# Altium PCB Copy of GSH_Bed_V1.0.PcbDoc
Units mm, origin at the board's own origin, x right, y up, seen from the top; angles counter-clockwise.
Board outline 90 x 57 mm, 2 copper layers (Top Layer, Bottom Layer); 62 components, 55 nets, 266 pads, 410 vias.
Unrouted connection lines stored in the file: 43.
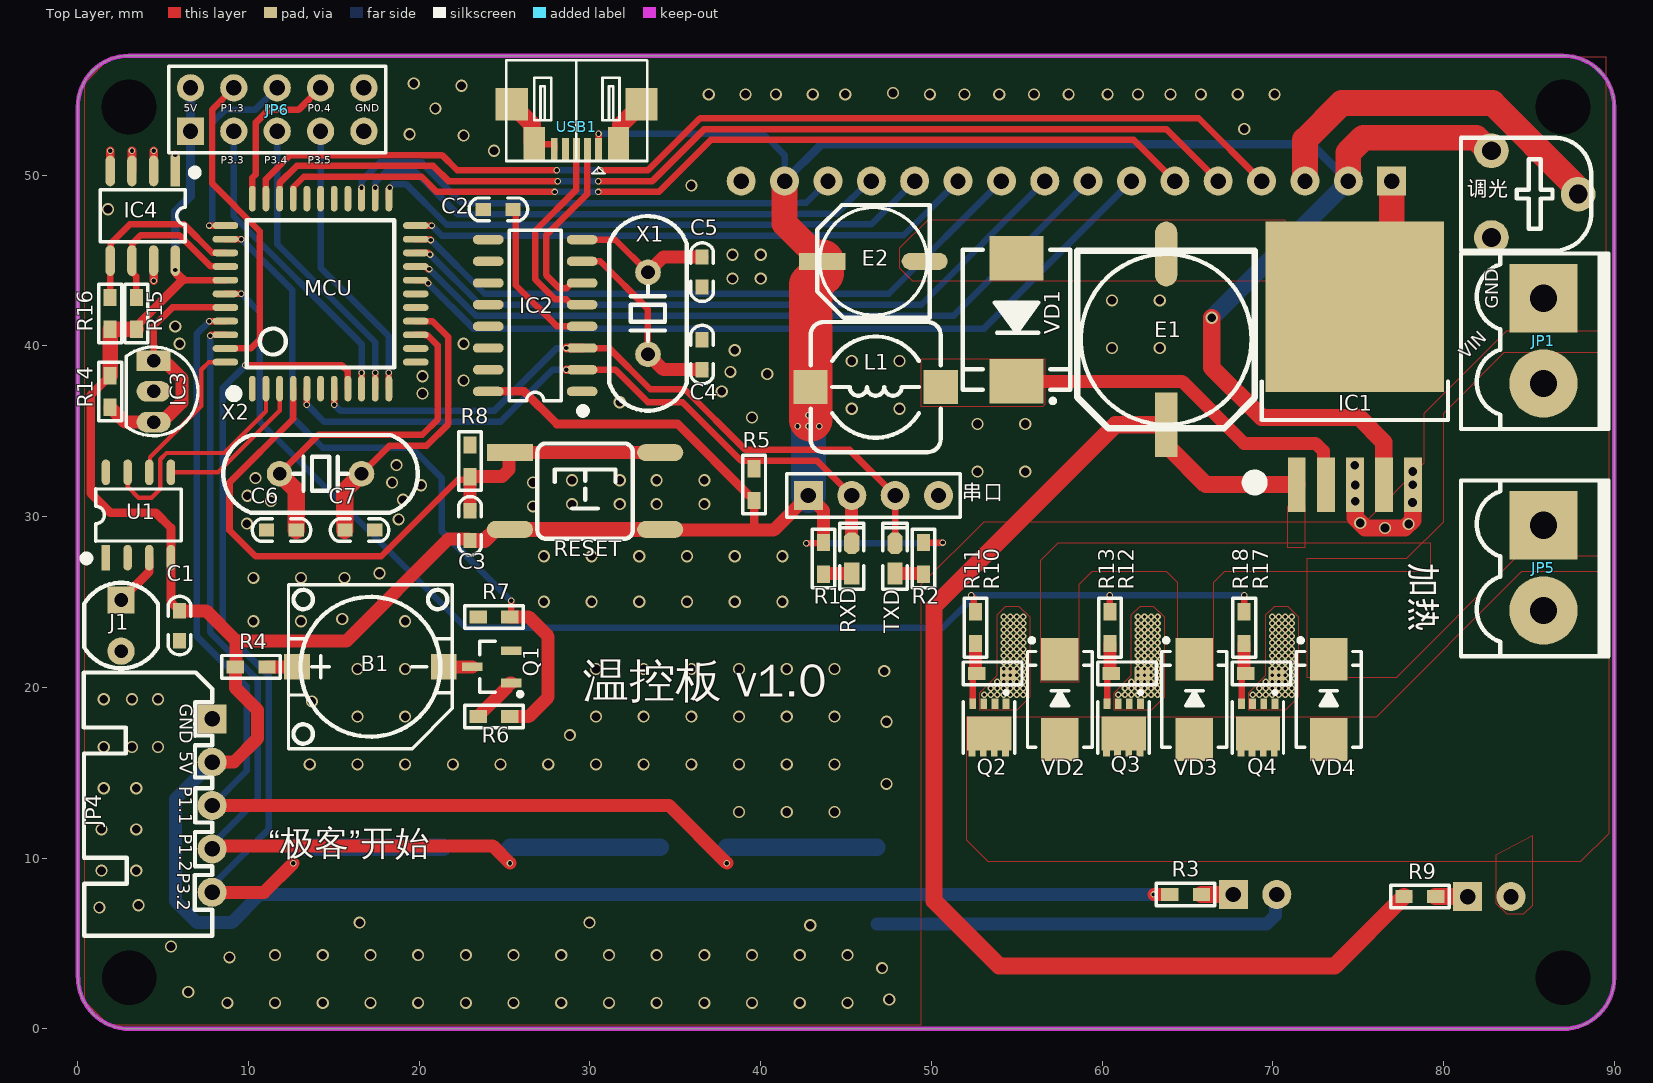
[diagram p0: Top Layer view]
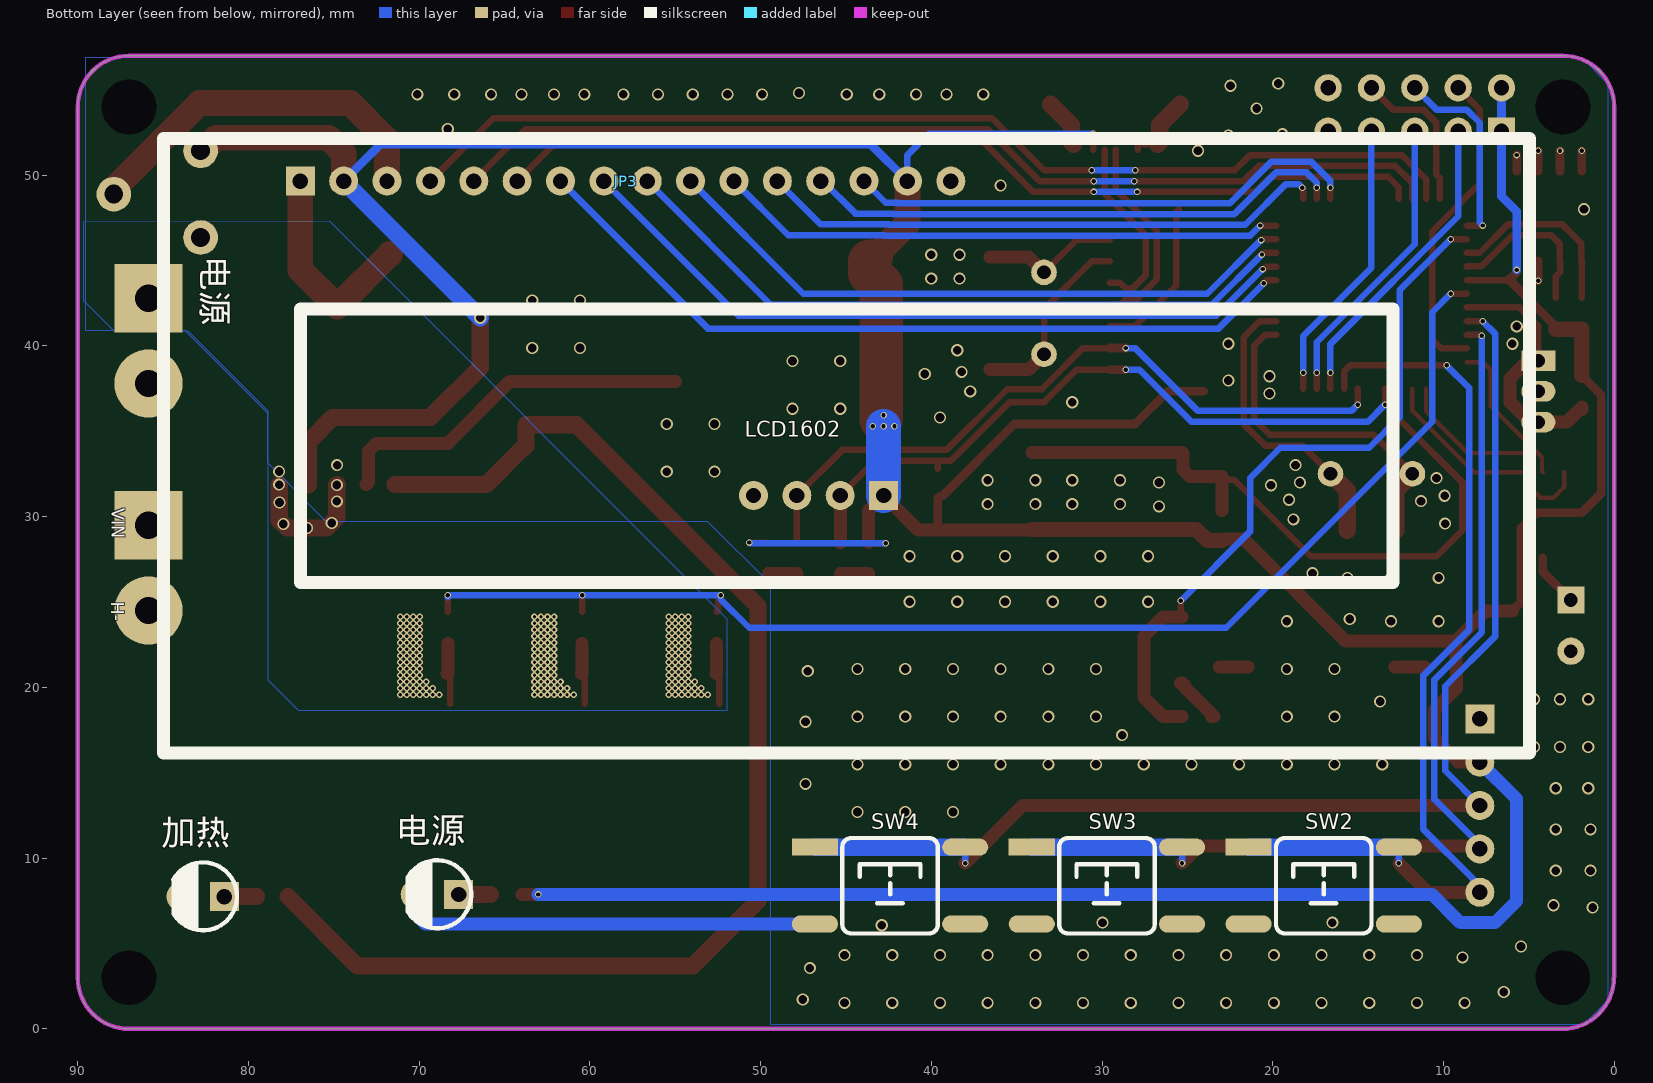
[diagram p1: Bottom Layer view, seen from below]

## Layer stack, top to bottom
Top Solder: solder mask 0.0102, Solder Resist, Dk 3.5
Top Layer: signal copper 0.0356
Dielectric 1: dielectric 0.32, FR-4, Dk 4.8
Bottom Layer: signal copper 0.0356
Bottom Solder: solder mask 0.0102, Solder Resist, Dk 3.5

## Board outline
0,3.023 0,54 cw(c3,54) 3,57 87,57 cw(c87,54) 90,54 90,3 cw(c87,3) 87,0 3.023,0 cw(c3.023,3)

## Design rules (kind name [scope] priority, off if disabled: settings)
AssemblyTestPointUsage [All] p0: scope1count=1 scope1_0_kind=Board scope1_0_value=Board scope2count=1 scope2_0_kind=Board scope2_0_value=Board commentlength=0
AssemblyTestpoint [All] p0: scope1count=1 scope1_0_kind=Board scope1_0_value=Board scope2count=1 scope2_0_kind=Board scope2_0_value=Board commentlength=0
Clearance [All] p0: scope1count=1 scope1_0_kind=Board scope1_0_value=Board scope2count=1 scope2_0_kind=Board scope2_0_value=Board commentlength=0 gap=0.254
Clearance [All] p1: gap=0.254 ignorepadtopadclearanceinfootprint=TRUE except(0: Arc-Hole Track-Hole SMDPad-Via SMDPad-Hole THPad-Via THPad-Hole Via-Via Via-Hole Fill-Hole Poly-Hole Region-Hole Text-Hole)
ComponentClearance [All] p0: scope1count=1 scope1_0_kind=Board scope1_0_value=Board scope2count=1 scope2_0_kind=Board scope2_0_value=Board commentlength=0 gap=0 collisioncheckmode=3
ComponentClearance [All] p1: gap=0 collisioncheckmode=3 verticalgap=0 showdistances=FALSE donotcheckwithout3dbody=TRUE
DiffPairsRouting [All] p0: scope1count=1 scope1_0_kind=Board scope1_0_value=Board scope2count=1 scope2_0_kind=Board scope2_0_value=Board commentlength=0
FabricationTestPointUsage [All] p0: scope1count=1 scope1_0_kind=Board scope1_0_value=Board scope2count=1 scope2_0_kind=Board scope2_0_value=Board commentlength=0 valid=0 allowmultiple=FALSE
FabricationTestpoint [All] p0: scope1count=1 scope1_0_kind=Board scope1_0_value=Board scope2count=1 scope2_0_kind=Board scope2_0_value=Board commentlength=0 side=3 testpointundercomponent=TRUE minsize=1.016 maxsize=2.54 preferedsize=1.524 minholesize=0 maxholesize=1.016 preferedholesize=0.813 testpointgrid=0.025
FanoutControl Fanout_BGA [All] p0 off: scope1count=1 scope1_0_kind=Board scope1_0_value=Board scope2count=1 scope2_0_kind=Board scope2_0_value=Board commentlength=69 // Protel DXP Scope 1 Expression Was: IsBGA   Fanout_BGA (Default Rule)
FanoutControl Fanout_LCC [All] p0 off: scope1count=1 scope1_0_kind=Board scope1_0_value=Board scope2count=1 scope2_0_kind=Board scope2_0_value=Board commentlength=69 // Protel DXP Scope 1 Expression Was: IsLCC   Fanout_LCC (Default Rule)
FanoutControl Fanout_SOIC [All] p0 off: scope1count=1 scope1_0_kind=Board scope1_0_value=Board scope2count=1 scope2_0_kind=Board scope2_0_value=Board commentlength=71 // Protel DXP Scope 1 Expression Was: IsSOIC   Fanout_SOIC (Default Rule)
FanoutControl Fanout_Small [All] p0 off: scope1count=1 scope1_0_kind=Board scope1_0_value=Board scope2count=1 scope2_0_kind=Board scope2_0_value=Board commentlength=84 // Protel DXP Scope 1 Expression Was: (CompPinCount < 5)   Fanout_Small (Default Rule)
FanoutControl Fanout_Default [All] p0: scope1count=1 scope1_0_kind=Board scope1_0_value=Board scope2count=1 scope2_0_kind=Board scope2_0_value=Board commentlength=30 // Fanout_Default (Default Rule)
Height [All] p0: scope1count=1 scope1_0_kind=Board scope1_0_value=Board scope2count=1 scope2_0_kind=Board scope2_0_value=Board commentlength=0
HoleSize [All] p0: scope1count=1 scope1_0_kind=Board scope1_0_value=Board scope2count=1 scope2_0_kind=Board scope2_0_value=Board commentlength=0 absolutevalues=TRUE maxlimit=2.54 minlimit=0.025 maxpercent=80.000 minpercent=20.000
HoleToHoleClearance [All] p0: scope1count=1 scope1_0_kind=Board scope1_0_value=Board scope2count=1 scope2_0_kind=Board scope2_0_value=Board commentlength=0
LayerPairs [All] p0: scope1count=1 scope1_0_kind=Board scope1_0_value=Board scope2count=1 scope2_0_kind=Board scope2_0_value=Board commentlength=0 enforce=TRUE
MinimumSolderMaskSliver [All] p0: scope1count=1 scope1_0_kind=Board scope1_0_value=Board scope2count=1 scope2_0_kind=Board scope2_0_value=Board commentlength=0
NetAntennae [All] p0: scope1count=1 scope1_0_kind=Board scope1_0_value=Board scope2count=1 scope2_0_kind=Board scope2_0_value=Board commentlength=0
PasteMaskExpansion [All] p0: scope1count=1 scope1_0_kind=Board scope1_0_value=Board scope2count=1 scope2_0_kind=Board scope2_0_value=Board commentlength=0 expansion=0
PlaneClearance [All] p0: scope1count=1 scope1_0_kind=Board scope1_0_value=Board scope2count=1 scope2_0_kind=Board scope2_0_value=Board commentlength=0 clearance=0.508
PlaneConnect [All] p0: scope1count=1 scope1_0_kind=Board scope1_0_value=Board scope2count=1 scope2_0_kind=Board scope2_0_value=Board commentlength=0 planeconnectstyle=Relief reliefexpansion=0.508 reliefentries=4 reliefconductorwidth=0.762 reliefairgap=0.762
PlaneConnect [All] p1: planeconnectstyle=Relief reliefexpansion=0.508 reliefentries=4 reliefconductorwidth=0.762 reliefairgap=0.762
PolygonConnect 5V [All] p0: scope1count=1 scope1_0_kind=Net scope1_0_value=5V scope2count=1 scope2_0_kind=Net scope2_0_value=5V commentlength=0 connectstyle=Direct reliefconductorwidth=0.254 reliefentries=4 polygonreliefangle="90 Angle"
PolygonConnect 1 [All] p0: scope1count=1 scope1_0_kind=Net scope1_0_value=NetIC1_2 scope2count=1 scope2_0_kind=Net scope2_0_value=NetIC1_2 commentlength=0 connectstyle=Direct reliefconductorwidth=0.254 reliefentries=4 polygonreliefangle="90 Angle"
PolygonConnect H- [All] p0: scope1count=1 scope1_0_kind=Net scope1_0_value=H- scope2count=1 scope2_0_kind=Net scope2_0_value=H- commentlength=0 connectstyle=Direct reliefconductorwidth=0.254 reliefentries=4 polygonreliefangle="90 Angle"
PolygonConnect VIN [All] p0: scope1count=1 scope1_0_kind=Net scope1_0_value=VIN scope2count=1 scope2_0_kind=Net scope2_0_value=VIN commentlength=0 connectstyle=Direct reliefconductorwidth=0.254 reliefentries=4 polygonreliefangle="90 Angle"
PolygonConnect GND [All] p0: scope1count=1 scope1_0_kind=Net scope1_0_value=GND scope2count=1 scope2_0_kind=Net scope2_0_value=GND commentlength=0 connectstyle=Direct reliefconductorwidth=0.254 reliefentries=4 polygonreliefangle="90 Angle"
PolygonConnect [All] p0: scope1count=1 scope1_0_kind=Board scope1_0_value=Board scope2count=1 scope2_0_kind=Board scope2_0_value=Board commentlength=0 connectstyle=Relief reliefconductorwidth=0.762 reliefentries=4 polygonreliefangle="45 Angle"
PolygonConnect 5V [InNet('5V') vs InNet('5V')] p1: connectstyle=Direct reliefconductorwidth=0.254 reliefentries=4 polygonreliefangle="90 Angle" airgapwidth=0.254
PolygonConnect H- [InNet('H-') vs InNet('H-')] p2: thpad.connectstyle=Direct thpad.reliefconductorwidth=0.254 thpad.reliefentries=4 thpad.polygonreliefangle="90 Angle" thpad.airgapwidth=0.254 smdpad.connectstyle=Direct smdpad.reliefconductorwidth=0.254 smdpad.reliefentries=4 smdpad.polygonreliefangle="90 Angle" smdpad.airgapwidth=0.254 via.connectstyle=Relief via.reliefconductorwidth=0.254 via.reliefentries=4 via.polygonreliefangle="90 Angle" via.airgapwidth=0.254
PolygonConnect VIN [InNet('VIN') vs InNet('VIN')] p3: thpad.connectstyle=Direct thpad.reliefconductorwidth=0.254 thpad.reliefentries=4 thpad.polygonreliefangle="90 Angle" thpad.airgapwidth=0.254 smdpad.connectstyle=Direct smdpad.reliefconductorwidth=0.254 smdpad.reliefentries=4 smdpad.polygonreliefangle="90 Angle" smdpad.airgapwidth=0.254 via.connectstyle=Relief via.reliefconductorwidth=0.254 via.reliefentries=4 via.polygonreliefangle="90 Angle" via.airgapwidth=0.254
PolygonConnect GND [InNet('GND') vs InNet('GND')] p4: connectstyle=Direct reliefconductorwidth=0.254 reliefentries=4 polygonreliefangle="90 Angle" airgapwidth=0.254
PolygonConnect 1 [InNet('NetIC1_2') vs InNet('NetIC1_2')] p5: connectstyle=Direct reliefconductorwidth=0.254 reliefentries=4 polygonreliefangle="90 Angle" airgapwidth=0.254
PolygonConnect [All] p6: connectstyle=Relief reliefconductorwidth=0.762 reliefentries=4 polygonreliefangle="45 Angle" airgapwidth=1.27
RoutingCorners [All] p0: scope1count=1 scope1_0_kind=Board scope1_0_value=Board scope2count=1 scope2_0_kind=Board scope2_0_value=Board commentlength=0 cornerstyle=45-Degree minsetback=2.54 maxsetback=2.54
RoutingLayers [All] p0: scope1count=1 scope1_0_kind=Board scope1_0_value=Board scope2count=1 scope2_0_kind=Board scope2_0_value=Board commentlength=0 top layer=Automatic bottom layer=Automatic
RoutingPriority [All] p0: scope1count=1 scope1_0_kind=Board scope1_0_value=Board scope2count=1 scope2_0_kind=Board scope2_0_value=Board commentlength=0
RoutingTopology [All] p0: scope1count=1 scope1_0_kind=Board scope1_0_value=Board scope2count=1 scope2_0_kind=Board scope2_0_value=Board commentlength=0 topology=Shortest
RoutingVias [All] p0: scope1count=1 scope1_0_kind=Board scope1_0_value=Board scope2count=1 scope2_0_kind=Board scope2_0_value=Board commentlength=0 holewidth=0.254 width=0.381 viastyle="Through Hole" minholewidth=0.203 minwidth=0.305 maxholewidth=0.711 maxwidth=1.27
RoutingVias [All] p1: holewidth=0.254 width=0.381 viastyle="Through Hole" minholewidth=0.203 minwidth=0.305 maxholewidth=0.711 maxwidth=1.27
ShortCircuit [All] p0: scope1count=1 scope1_0_kind=Board scope1_0_value=Board scope2count=1 scope2_0_kind=Board scope2_0_value=Board commentlength=0 allowed=TRUE
ShortCircuit [All] p1: allowed=TRUE
SilkToBoardRegionClearance [All] p0: scope1count=1 scope1_0_kind=Board scope1_0_value=Board scope2count=1 scope2_0_kind=Board scope2_0_value=Board commentlength=0
SilkToSilkClearance [All] p0: scope1count=1 scope1_0_kind=Board scope1_0_value=Board scope2count=1 scope2_0_kind=Board scope2_0_value=Board commentlength=0
SilkToSolderMaskClearance [All] p0 off: scope1count=1 scope1_0_kind=Board scope1_0_value=Board scope2count=1 scope2_0_kind=Board scope2_0_value=Board commentlength=44 // Protel DXP Scope 1 Expression Was: IsPad
SolderMaskExpansion [All] p0: scope1count=1 scope1_0_kind=Board scope1_0_value=Board scope2count=1 scope2_0_kind=Board scope2_0_value=Board commentlength=0 expansion=0.102
SolderMaskExpansion [All] p1: expansion=0.102 istentingtop=FALSE
UnRoutedNet [All] p0: scope1count=1 scope1_0_kind=Board scope1_0_value=Board scope2count=1 scope2_0_kind=Board scope2_0_value=Board commentlength=0
UnpouredPolygon [All] p0: scope1count=1 scope1_0_kind=Board scope1_0_value=Board scope2count=1 scope2_0_kind=Board scope2_0_value=Board commentlength=0
Width [All] p0: scope1count=1 scope1_0_kind=Board scope1_0_value=Board scope2count=1 scope2_0_kind=Board scope2_0_value=Board commentlength=0 maxlimit=2.54 minlimit=0.152 preferedwidth=0.254
Width [All] p1: maxlimit=2.54 minlimit=0.152 preferedwidth=0.254
27 further rules are at their usual default settings.

## Components (designator, comment, footprint, x,y, rotation, side; value= is the part's Value field where it differs from the comment)
B1 "DC5V" Buzzer 17.145,21.209 r0 top
C1 "104" "C 0603" 5.969,23.622 r90 top
C2 "104" "C 0603" 24.638,48.006 r0 top
C3 "10uf" "C 0603" 22.987,29.464 r270 top
C4 "22PF" "C 0603" 36.576,39.497 r90 top
C5 "22PF" "C 0603" 36.576,44.323 r270 top
C6 "22pf" "C 0603" 11.938,29.21 r0 top
C7 "22pf" "C 0603" 16.51,29.21 r180 top
E1 "680uF/10V" "CM F(10*10.2)" 63.754,40.386 r270 top
E2 "220uF/10V" "CM D(6.3*5.4)" 46.609,44.958 r180 top
IC1 "LM2596-5.0V" TO263-5A 74.803,31.877 r0 top
IC2 "CH340G" SOP16_N 26.797,41.783 r180 top
IC3 "TL431" TO92A 4.445,37.338 r180 top
IC4 "AT24C02" SOP8_N 3.81,47.625 r270 top
J1 "K电偶" RG5528 2.54,23.622 r270 top
JP1 "HDR-1X2" KF2EDGK5.0-2P 85.852,42.799 r270 top
JP3 "HDR-1X16" LCD-1602 84.963,16.129 r180 bottom locked
JP4 "HDR-1X5" XH2.54-5P_H 7.874,18.161 r270 top
JP5 "HDR-1X2" KF2EDGK5.0-2P 85.852,29.5 r270 top
JP6 "Header 5X2" HDR-5X2 6.604,52.578 r0 top
L1 "33uH/330" CDRH74 46.736,37.592 r180 top
MCU "U?" "LQFP44 10X10_L" 14.224,43.053 r0 top (schematic designator STC1)
Q1 "S8050" SOT23-3N 24.257,21.209 r90 top
Q2 "AON7544" AON7544 53.379,17.65 r180 top
Q3 "AON7544" AON7544 61.253,17.65 r180 top
Q4 "AON7544" AON7544 69.127,17.65 r180 top
R1 "2K" "R 0603-HP" 43.688,27.559 r90 top
R2 "2K" "R 0603-HP" 49.53,27.559 r90 top
R3 "2K" "R 0603-HP" 64.897,7.874 r180 top
R4 "10R" "R 0603-HP" 10.16,21.209 r180 top
R5 "10K" "R 0603-HP" 39.624,31.877 r270 top
R6 "1K" "R 0603-HP" 24.384,18.288 r180 top
R7 "10K" "R 0603-HP" 24.384,24.13 r0 top
R8 "10K" "R 0603-HP" 22.987,33.274 r270 top
R9 "10K" "R 0603-HP" 78.613,7.747 r180 top
R10 "100K" "R 0603-HP" 53.594,20.828 r0 top
R11 "100" "R 0603-HP" 52.578,23.495 r270 top
R12 "100K" "R 0603-HP" 61.468,20.828 r0 top
R13 "100" "R 0603-HP" 60.452,23.495 r270 top
R14 "100" "R 0603-HP" 1.905,37.338 r90 top
R15 "10K" "R 0603-HP" 3.429,41.91 r270 top
R16 "10K" "R 0603-HP" 1.905,41.91 r270 top
R17 "100K" "R 0603-HP" 69.342,20.828 r0 top
R18 "100" "R 0603-HP" 68.326,23.495 r270 top
RESET "6x6x5" "TSW SMD-6*6*4.3" 29.718,31.496 r0 top (schematic designator SW1)
RXD "蓝色" "LED 0603B" 45.339,27.559 r90 top (schematic designator LED1)
SW2 "6x6x5" "TSW SMD-6*6*4.3" 17.018,8.382 r180 bottom
SW3 "6x6x5" "TSW SMD-6*6*4.3" 29.718,8.382 r180 bottom
SW4 "6x6x5" "TSW SMD-6*6*4.3" 42.418,8.382 r180 bottom
TXD "绿色" "LED 0603G" 47.879,27.559 r90 top (schematic designator LED2)
U1 "MAX6675" SOP8_L 3.556,30.099 r90 top
USB1 "USB-5P" USB-MICRO_A 29.21,53.848 r180 top
VD1 "B540C" SMC 54.991,41.529 r270 top
VD2 "D1" SMB 57.531,19.304 r90 top
VD3 "D1" SMB 65.405,19.304 r90 top
VD4 "D1" SMB 73.279,19.304 r90 top
X1 "12MHz" "XTAL-49S DIP" 33.401,41.91 r90 top
X2 "11.0592MHz" "XTAL-49S DIP" 14.224,32.512 r180 top
串口 "HDR-1X4" HDR-1X4 42.799,31.242 r0 top (schematic designator JP2)
加热 "红色" "LED 3MM-R" 82.677,7.747 r0 bottom (schematic designator LED4)
电源 "红色" "LED 3MM-R" 68.961,7.874 r0 bottom (schematic designator LED3)
调光 "10K" RM065 87.884,48.895 r270 top (schematic designator RP1)

## Footprints (in the part's own frame and the unit in brackets; to place one, negate y for a bottom-side part, rotate by r counter-clockwise, add the part's x,y. Pads: shape width x height; smd on the part's side, far side on the other; paste and mask are expansions set on the pad)
AON7544 [mm] "N-MOS"
  rect 0.4x0.6 smd: 1(-0.992,-1.4) 2(-0.342,-1.4) 3(0.308,-1.4) 4(0.958,-1.4) 5(0.992,1.4) 6(0.341,1.4) 7(-0.309,1.4) 8(-0.959,1.4)
  rect 2.6x2 smd: 9(-0.005,0.35)
  silkscreen extent -1.5,-2.15 1.5,1.5
Buzzer [mm] "蜂鸣器"
  rect 1.5x1.5 smd: 1(-4.3,0) 2(4.3,0)
  silkscreen extent -4.8,-4.8 4.8,4.8
"C 0603" [mil] "无极性贴片电容"
  rect 35x30 smd: 1(-35,0) 2(34,0)
  silkscreen extent -67,-26 67,26
CDRH74 [mm] "7.3*7.3*4.5mm（长宽高）"
  rect 2x2 smd: 1(-3.81,0) 2(3.81,0)
  silkscreen extent -3.81,-3.81 3.81,3.81
"CM D(6.3*5.4)" [mm] "贴片电解电容，直径6.3mm，高5.4mm"
  rect 2.7x1 smd: 1(3,0)
  oval 2.7x1 smd: 2(-3,0)
  silkscreen extent -3.3,-3.3 3.3,3.3
"CM F(10*10.2)" [mm] "贴片电解电容，直径10mm，高10.2mm"
  rect 3.8x1.3 smd: 1(5,0)
  oval 3.8x1.3 smd: 2(-5,0)
  silkscreen extent -5.2,-5.2 5.2,5.2
HDR-1X4 [mm] "排针，4脚"
  rect 1.7x1.7 hole 0.9: 1(0,0)
  round 1.7 hole 0.9: 2(2.54,0) 3(5.08,0) 4(7.62,0)
  silkscreen extent -1.27,-1.27 8.89,1.27
HDR-5X2 [mm] "双排排针，5x2脚"
  rect 1.6x1.6 hole 0.9: 1(0,0)
  round 1.6 hole 0.9: 2(0,2.54) 3(2.54,0) 4(2.54,2.54) 5(5.08,0) 6(5.08,2.54) 7(7.62,0) 8(7.62,2.54) 9(10.16,0) 10(10.16,2.54)
  silkscreen extent -1.27,-1.27 11.43,3.81
KF2EDGK5.0-2P [mm] "直列插拔式端子"
  rect 4x4 hole 1.6: 1(0,0)
  round 4 hole 1.6: 2(5,0)
  silkscreen extent -2.62,-4.83 7.67,3.81
LCD-1602 [mm]
  rect 1.7x1.7 hole 0.9: 1(8.001,33.528)
  round 1.7 hole 0.9: 2(10.541,33.528) 3(13.081,33.528) 4(15.621,33.528) 5(18.161,33.528) 6(20.701,33.528) 7(23.241,33.528) 8(25.781,33.528) 9(28.321,33.528) 10(30.861,33.528) 11(33.401,33.528) 12(35.941,33.528) 13(38.481,33.528) 14(41.021,33.528) 15(43.561,33.528) 16(46.101,33.528)
  silkscreen extent 0,0.03 80,36.03
"LED 3MM-R" [mm] "红色3mm直插LED"
  rect 1.7x1.7 hole 0.9: 1(-1.27,0)
  round 1.7 hole 0.9: 2(1.27,0)
  silkscreen extent -2.01,-2 1.72,1.98
"LED 0603B" [mil] "蓝色0603LED"
  rect 50x35 smd: 1(-35,0.26)
  oct 50x35 smd: 2(35,0.26)
  silkscreen extent -71,-28 81,28
"LED 0603G" [mil] "绿色0603LED"
  rect 50x35 smd: 1(-35,0.26)
  oct 50x35 smd: 2(35,0.26)
  silkscreen extent -71,-28 81,28
"LQFP44 10X10_L" [mm] "44脚，体宽10x10mm，脚距0.8mm"
  oval 0.4x1.5 smd: 1(-4,-5.551) 2(-3.2,-5.551) 3(-2.4,-5.551) 4(-1.6,-5.551) 5(-0.8,-5.551) 6(0,-5.551) 7(0.8,-5.551) 8(1.6,-5.551) 9(2.4,-5.551) 10(3.2,-5.551) 11(4,-5.551) 23(4,5.578) 24(3.2,5.578) 25(2.4,5.578) 26(1.6,5.578) 27(0.8,5.578) 28(0,5.578) 29(-0.8,5.578) 30(-1.6,5.578) 31(-2.4,5.578) 32(-3.2,5.578) 33(-4,5.578)
  oval 1.5x0.4 smd: 12(5.575,-4) 13(5.575,-3.2) 14(5.575,-2.4) 15(5.575,-1.6) 16(5.575,-0.8) 17(5.575,0) 18(5.575,0.8) 19(5.575,1.6) 20(5.575,2.4) 21(5.575,3.2) 22(5.575,4) 34(-5.575,4) 35(-5.575,3.2) 36(-5.575,2.4) 37(-5.575,1.6) 38(-5.575,0.8) 39(-5.575,0) 40(-5.575,-0.8) 41(-5.575,-1.6) 42(-5.575,-2.4) 43(-5.575,-3.2) 44(-5.575,-4)
  silkscreen extent -5.33,-6.09 4.32,4.32
"R 0603-HP" [mil] "1/10W高精度贴片电阻"
  rect 40x30 smd: 1(-36.5,0) 2(36.5,0)
  silkscreen extent -68,-26 68,26
RG5528 [mm] "光敏电阻 脚距：3mm"
  rect 1.6x1.6 hole 0.8: 1(-1.5,0)
  round 1.6 hole 0.8: 2(1.5,0)
  silkscreen extent -2.5,-2.16 2.5,2.16
RM065 [mil] "蓝白可调电位器"
  round 80 hole 43.31: 1(-100,-200) 2(0,0) 3(100,-200)
  silkscreen extent -130,-270 130,30
SMB [mm] "4.7*3.9*2.2mm(长宽高，不包括引脚）"
  rect 2.5x2.2 smd: 1(-2.35,0) 2(2.35,0)
  silkscreen extent -2.8,-1.9 3.57,1.9
SMC [mm] "7.1x5.9*2.3mm（长宽高，不包括引脚）"
  rect 2.6x3.15 smd: 1(-3.6,0) 2(3.6,0)
  silkscreen extent -4.1,-3.15 4.87,3.15
SOP8_L [mm] "5*6*1.8mm（长宽高）"
  rect 1.5x0.5 smd: 1(-2.5,1.905)
  oval 1.5x0.5 smd: 2(-2.5,0.635) 3(-2.5,-0.635) 4(-2.5,-1.905) 5(2.5,-1.905) 6(2.5,-0.635) 7(2.5,0.635) 8(2.5,1.905)
  silkscreen extent -2.69,-2.5 1.52,3.2
SOP8_N [mm] "5*6*1.8mm（长宽高）"
  rect 1.8x0.55 smd: 1(-2.625,1.905)
  oval 1.8x0.55 smd: 2(-2.625,0.635) 3(-2.625,-0.635) 4(-2.625,-1.905) 5(2.625,-1.905) 6(2.625,-0.635) 7(2.625,0.635) 8(2.625,1.905)
  silkscreen extent -2.69,-2.5 1.52,3.2
SOP16_N [mm] "10.3*6.2*1.8mm（长宽高）"
  oval 1.8x0.55 smd: 1(-2.75,4.445) 2(-2.75,3.175) 3(-2.75,1.905) 4(-2.75,0.635) 5(-2.75,-0.635) 6(-2.75,-1.905) 7(-2.75,-3.175) 8(-2.75,-4.445) 9(2.75,-4.445) 10(2.75,-3.175) 11(2.75,-1.905) 12(2.75,-0.635) 13(2.75,0.635) 14(2.75,1.905) 15(2.75,3.175) 16(2.75,4.445)
  silkscreen extent -2.95,-5 1.52,5.74
SOT23-3N [mm] "3x1.3x1mm(长宽高)"
  rect 0.5x1.2 smd: 1(-0.95,-1.143) 2(0.95,-1.143) 3(0,1.143)
  silkscreen extent -1.72,-1.78 1.5,0.7
TO92A [mm] "92晶体管"
  rect 2x1.2 hole 0.8: 1(0,-1.8)
  oval 2x1.2 hole 0.8: 2(0,0) 3(0,1.8)
  silkscreen extent -2.6,-2.6 1.6,2.6
TO263-5A [mm] "263，5脚晶体管"
  rect 1.05x3.2 smd: 1(-3.4,0) 2(-1.7,0) 3(0,0) 4(1.7,0) 5(3.4,0)
  rect 10.45x10 smd: 3(0,10.414)
  silkscreen extent -6.24,-0.25 5.46,6.04
"TSW SMD-6*6*4.3" [mm] "6*6*4.3mm"
  rect 2.7x1 smd: 1(-4.4,2.261)
  oval 2.7x1 smd: 2(-4.4,-2.239) 3(4.4,-2.239) 4(4.4,2.261)
  silkscreen extent -2.79,-2.79 2.79,2.79
USB-MICRO_A [mm] "micro型USB ，5.9*8.2*2.5mm"
  rect 0.4x1.4 smd: 1(-1.296,2.355) 2(-0.648,2.355) 3(0,2.355) 4(0.648,2.355) 5(1.295,2.355)
  rect 1.9x1.9 smd: 5(-3.81,-0.312) 5(3.784,-0.312)
  rect 1.25x2 smd: 5(-2.464,2.025) 5(2.464,2.025)
  silkscreen extent -4.14,-2.89 4.11,3.75
XH2.54-5P_H [mm] "接插件，5P"
  rect 1.7x1.7 hole 0.9: 1(0,0)
  round 1.7 hole 0.9: 2(2.54,0) 3(5.08,0) 4(7.62,0) 5(10.16,0)
  silkscreen extent -2.72,-7.53 12.7,0
"XTAL-49S DIP" [mm]
  round 1.5 hole 0.8: 1(-2.4,0) 2(2.4,0)
  silkscreen extent -5.7,-2.28 5.7,2.28

## Part data
B1: library part BEEP, "蜂鸣器"
C1: library part Cap, "Capacitor"
C2 C3 C4 C5 C6 C7: library part C, "无极性贴片电容"
E1 E2: library part C-CM, "贴片电解电容"
IC1: library part LM2596, "DC降压芯片"
IC2: "串口转USB"
IC3: library part TL431-ID, "可调基准稳压芯片"
IC4: library part 24Cxx, "外置EEPROM"
J1: library part CON2, "Connector"
JP1 JP5: library part "Header 2", "2P接插件"
JP3: library part "Header 16", "16P接插件"
JP4: library part "Header 5", "5P接插件"
JP6: "5*2P接插件"
L1: library part L-CDRH, "功率屏蔽电感"
Q1: library part 8050-SMD, "高频放大-NPN型"
Q2 Q3 Q4: "n-mos"
R1 R2 R3 R4 R5 R6 R7 R8 R9 R10 R11 R12 R13 R14 R15 R16 R17 R18: library part R, "贴片电阻"
RESET: library part "TSW DIP-6x6", "直插6x6轻触开关"
RXD TXD 加热 电源: library part LED-SMD, "贴片LED"
SW2 SW3 SW4: library part "TSW SMD-6x6", "贴片6x6轻触开关"
U1: "K电偶转换"
USB1: "微型USB母座"
VD1: library part SS34, "肖特基二极管"
VD2 VD3 VD4: library part M7, "整流二极管"
X1 X2: library part XTAL-2, "2脚晶振"
串口: library part "Header 4", "4P接插件"
调光: library part RP-ID, "插件单联电位器"

## Free pads (board coordinates)
  round 3 hole 3.2 paste+0 mask+0: 20(3,54) 20(3.023,3) 20(87,3) 20(87,54)

## Via types
v1: diameter 0.711, hole 0.508, Top Layer to Bottom Layer, tented both sides, 188 vias
v2: diameter 0.381, hole 0.203, Top Layer to Bottom Layer, tented both sides, 174 vias
v3: diameter 0.381, hole 0.254, Top Layer to Bottom Layer, tented both sides, 48 vias

## Nets (pads, with @x,y where several pads share a name; then routed paths per layer and width w, separated by ;. In a path a pad name is that pad's centre, name@x,y a point inside that pad or via, vN(x,y) a via of type N, cw(c..) or ccw(c..) an arc to the next point about the centre after c; other vN are vias at no path point)
5V: C1.2 C3.2 E2.1 IC1.4 IC2.16 IC4.8 JP3.2 JP3.15 JP4.2 JP6.1 JP6.2 L1.2 MCU.38 R1.2 R2.2 R3.2 R4.2 R5.2 R14.2 R15.2 R16.2 RESET.2 RESET.3 U1.4 USB1.1 串口.1 调光.1 | length 300.6
  Top Layer w0.381: 6.17,43.853 MCU.38 ; USB1.1 v3(30.506,52.43) ; v3(42.672,28.448) R1.2@43.688,28.448 ; R2.2 v3(50.666,28.486)
  Top Layer w0.508: R14.2 0.762,37.122 0.762,31.369 1.905,30.226 4.572,30.226 5.461,29.337 U1.4 5.461,24.994 5.779,24.676 5.842,24.676 5.969,24.549 C1.2 ; R15.2 3.556,41.11 3.556,41.275 6.152,43.871 ; v3(5.715,44.45) 5.715,44.386 5.734,44.367 5.734,44.289 6.152,43.871 ; 6.17,43.853 6.152,43.871 ; 6.17,43.889 6.152,43.871 ; IC2.16 26.162,37.338 28.067,35.433 35.141,35.433 39.37,31.204 39.497,31.204 39.624,31.077 R5.2 39.624,29.21
  Top Layer w0.762: C1.2 7.518,24.486 9.271,22.733 ; JP4.2 7.886,15.633 9.156,15.633 10.541,17.018 10.541,18.669 9.233,19.977 R4.2 9.271,21.209 9.271,22.733 ; C3.2 22.987,28.664 22.924,28.664 22.885,28.702 21.717,28.702 15.748,22.733 9.271,22.733 ; RESET.3 34.164,29.211 35.182,29.211 35.183,29.21 39.624,29.21 40.767,29.21 串口.1 43.688,30.353 R1.2 ; v3(63.032,7.874) R3.2
  Top Layer w0.889: R14.2 R16.2 R15.2 ; C3.2 23.828,28.6 24.484,29.257 RESET.2 RESET.3
  Top Layer w1.016: v1(66.421,41.656) 66.421,38.735 69.342,35.814 75.057,35.814 76.503,34.368 IC1.4
  Top Layer w1.5: JP3.2 74.422,51.318 75.301,52.197 81.898,52.197 82.66,51.435 调光.1
  Top Layer w1.524: JP3.15 41.402,47.165 43.021,45.546 43.021,45.22 43.283,44.958 E2.1
  Top Layer w2.54: 42.926,35.687 L1.2 42.926,43.585 43.609,44.268 E2.1
  Bottom Layer w0.381: v3(30.506,52.43) 40.153,52.43 41.402,51.181 JP3.15 ; v3(42.672,28.448) 50.627,28.448 v3(50.666,28.486)
  Bottom Layer w0.508: v3(5.715,44.45) 5.715,47.879 6.604,48.768 JP6.1 JP6.2 ; JP3.15 43.561,51.816 72.263,51.816 JP3.2
  Bottom Layer w0.762: JP4.2 5.715,13.462 5.715,7.493 6.985,6.223 9.017,6.223 10.668,7.874 v3(63.032,7.874)
  Bottom Layer w1.016: v1(66.421,41.656) JP3.2
  Bottom Layer w2.032: 串口.1 v3(42.799,35.306)
  other v3: 42.164,35.306 43.434,35.306 42.799,35.941
C-RXD: IC2.3 MCU.7 TXD.2 串口.3 | length 41.9
  Top Layer w0.381: v3(15.024,36.565) MCU.7 ; v3@28.575,39.878 v3(28.609,39.878) ; IC2.3 31.124,39.878 33.537,37.465 35.56,37.465 39.116,33.909 45.212,33.909 串口.3 47.879,28.455 TXD.2
  Top Layer w0.508: v3(28.609,39.878) IC2.3
  Bottom Layer w0.381: v3(15.024,36.565) 15.394,36.195 24.384,36.195 28.067,39.878 v3(28.609,39.878)
C-TXD: IC2.2 MCU.5 R5.1 RXD.2 串口.2 | length 40.8
  Top Layer w0.381: v3(13.424,36.565) MCU.5 ; IC2.2 31.496,38.608 33.401,36.703 35.424,36.703 38.853,33.274 R5.1@39.624,33.274 ; R5.1 R5.1@39.624,33.274 ; 串口.2 43.307,33.274 R5.1@39.624,33.274
  Top Layer w0.508: v3(28.609,38.608) IC2.2
  Top Layer w0.762: RXD.2 45.332,31.235 串口.2
  Bottom Layer w0.381: v3(13.424,36.565) 14.429,35.56 24.765,35.56 27.813,38.608 v3(28.609,38.608)
CS: MCU.44 U1.6 | length 8.9
  Top Layer w0.254: U1.6 4.238,32.646 4.238,33.487 7.239,36.488 7.239,38.608 7.684,39.053 MCU.44
D_N: IC2.6 USB1.2 | length 10.9
  Top Layer w0.381: IC2.6 28.932,43.688 28.614,43.37 28.222,43.37 27.432,44.16 27.432,46.482 29.848,48.898 29.848,49.146 29.855,49.152 29.855,51.49 USB1.2
D_P: IC2.5 USB1.3 | length 12
  Top Layer w0.381: USB1.3 29.213,51.49 29.213,49.161 26.797,46.745 26.797,43.897 27.959,42.735 28.614,42.735 28.932,42.418 IC2.5
GND: C1.1 C2.1 C4.2 C5.2 C6.1 C7.1 E1.2 E2.2 IC1.3 IC1.5 IC2.1 IC3.2 IC4.1 IC4.2 IC4.3 IC4.4 IC4.7 J1.2 JP1.1 JP3.1 JP3.16 JP4.1 JP6.9 JP6.10 MCU.16 Q1.2 Q2.1 Q2.2 Q2.3 Q3.1 Q3.2 Q3.3 Q4.1 Q4.2 Q4.3 R7.1 R8.1 R10.2 R12.2 R17.2 SW2.2 SW2.3 SW3.2 SW3.3 SW4.2 SW4.3 U1.1 U1.2 USB1.5 VD1.1 串口.4 电源.2 调光.3 | length 58.2
  Top Layer w0.381: USB1.5@26.746,51.823 27.905,51.823 27.915,51.814 USB1.5@27.915,51.493
  Top Layer w0.508: IC4.4 v3(1.905,51.435) ; IC4.3 v3(3.175,51.435) ; v3(4.445,43.815) IC4.7 ; IC4.2 v3(4.445,51.435) ; IC4.1 v3(5.715,51.181)
  Top Layer w1.016: USB1.5@25.426,54.16 26.629,52.956 26.629,51.94 USB1.5@26.746,51.823 ; USB1.5@31.674,51.823 31.791,51.94 31.791,52.931 USB1.5@33.02,54.16 ; IC1.3@74.803,31.877 v1(74.82,31.86) 74.82,29.932 v1(75.118,29.635) 75.415,29.337 77.724,29.337 78.186,29.799 78.186,31.86 v1(78.203,31.877)
  Top Layer w1.5: IC1.3@71.708,45.386 74.803,42.291 76.962,44.45 JP3.1
  Bottom Layer w0.762: SW4.2 69.643,6.143 70.155,6.655 70.155,7.798 电源.2
  other v1: 8.763,1.524 11.557,1.524 14.351,1.524 17.145,1.524 19.939,1.524 22.733,1.524 25.527,1.524 28.321,1.524 31.115,1.524 33.909,1.524 36.703,1.524 39.497,1.524 42.291,1.524 45.085,1.524 47.531,1.723 6.477,2.159 47.117,3.556 8.89,4.191 11.557,4.318 14.351,4.318 17.145,4.318 19.939,4.318 22.733,4.318 25.527,4.318 28.321,4.318 31.115,4.318 33.909,4.318 36.703,4.318 39.497,4.318 42.291,4.318 45.085,4.318 5.461,4.826 42.902,6.071 16.51,6.223 29.972,6.223 1.27,7.112 3.556,7.239 1.397,9.271 3.429,9.271 1.397,11.684 3.429,11.684 38.735,12.7 41.529,12.7 44.323,12.7 1.524,14.097 3.429,14.097 47.371,14.351 13.589,15.494 16.383,15.494 19.177,15.494 21.971,15.494 24.765,15.494 27.559,15.494 30.353,15.494 33.147,15.494 35.941,15.494 38.735,15.494 41.529,15.494 44.323,15.494 1.524,16.51 3.175,16.51 4.699,16.51 28.828,17.205 47.374,17.987 16.383,18.288 19.177,18.288 30.353,18.288 33.147,18.288 35.941,18.288 38.735,18.288 41.529,18.288 44.323,18.288 13.716,19.177 1.524,19.304 3.175,19.304 4.699,19.304 47.244,20.955 16.383,21.082 19.177,21.082 30.353,21.082 33.147,21.082 35.941,21.082 38.735,21.082 41.529,21.082 44.323,21.082 10.287,23.876 13.081,23.876 19.177,23.876 15.494,24.003 27.305,25.019 30.099,25.019 32.893,25.019 35.687,25.019 38.481,25.019 41.275,25.019 10.287,26.416 13.081,26.416 15.621,26.416 17.671,26.688 27.305,27.686 30.099,27.686 32.893,27.686 35.687,27.686 38.481,27.686 41.275,27.686 76.57,29.337 77.955,29.568 9.906,29.591 18.796,29.845 26.67,30.607 28.956,30.734 31.75,30.734 33.909,30.734 36.703,30.734 78.186,30.829 74.82,30.896 11.317,30.911 19.05,30.988 9.937,31.228 20.111,31.844 18.415,32.004 26.67,32.004 28.956,32.131 31.75,32.131 33.909,32.131 36.703,32.131 10.414,32.258 52.705,32.639 55.499,32.639 78.203,32.646 18.669,33.02 74.803,33.02 52.705,35.433 55.499,35.433 39.497,35.814 45.339,36.322 48.133,36.322 31.75,36.703 20.193,37.211 37.719,37.338 22.606,37.973 20.193,38.227 40.386,38.354 38.227,38.481 45.339,39.116 48.133,39.116 38.481,39.751 60.579,39.878 63.373,39.878 5.969,40.132 22.606,40.132 5.715,41.148 60.579,42.672 63.373,42.672 38.354,43.942 40.005,43.942 38.354,45.339 40.005,45.339 1.778,48.006 35.941,49.403 24.384,51.435 22.606,52.324 19.44,52.4 68.326,52.705 20.951,53.911 36.957,54.737 39.116,54.737 40.894,54.737 43.053,54.737 44.958,54.737 49.911,54.737 51.943,54.737 53.975,54.737 56.007,54.737 58.039,54.737 60.325,54.737 62.103,54.737 64.008,54.737 65.786,54.737 67.945,54.737 70.104,54.737 47.756,54.821 22.479,55.245 19.685,55.372
  other v2: 53.086,19.558 53.467,19.558 53.848,19.558 54.229,19.558 54.61,19.558 54.991,19.558 55.372,19.558 60.96,19.558 61.341,19.558 61.722,19.558 62.103,19.558 62.484,19.558 62.865,19.558 63.246,19.558 68.834,19.558 69.215,19.558 69.596,19.558 69.977,19.558 70.358,19.558 70.739,19.558 71.12,19.558 53.467,19.939 53.848,19.939 54.229,19.939 54.61,19.939 54.991,19.939 55.372,19.939 61.341,19.939 61.722,19.939 62.103,19.939 62.484,19.939 62.865,19.939 63.246,19.939 69.215,19.939 69.596,19.939 69.977,19.939 70.358,19.939 70.739,19.939 71.12,19.939 53.848,20.32 54.229,20.32 54.61,20.32 54.991,20.32 55.372,20.32 61.722,20.32 62.103,20.32 62.484,20.32 62.865,20.32 63.246,20.32 69.596,20.32 69.977,20.32 70.358,20.32 70.739,20.32 71.12,20.32 54.229,20.701 54.61,20.701 54.991,20.701 55.372,20.701 62.103,20.701 62.484,20.701 62.865,20.701 63.246,20.701 69.977,20.701 70.358,20.701 70.739,20.701 71.12,20.701 54.229,21.082 54.61,21.082 54.991,21.082 55.372,21.082 62.103,21.082 62.484,21.082 62.865,21.082 63.246,21.082 69.977,21.082 70.358,21.082 70.739,21.082 71.12,21.082 54.229,21.463 54.61,21.463 54.991,21.463 55.372,21.463 62.103,21.463 62.484,21.463 62.865,21.463 63.246,21.463 69.977,21.463 70.358,21.463 70.739,21.463 71.12,21.463 54.229,21.844 54.61,21.844 54.991,21.844 55.372,21.844 62.103,21.844 62.484,21.844 62.865,21.844 63.246,21.844 69.977,21.844 70.358,21.844 70.739,21.844 71.12,21.844 54.229,22.225 54.61,22.225 54.991,22.225 55.372,22.225 62.103,22.225 62.484,22.225 62.865,22.225 63.246,22.225 69.977,22.225 70.358,22.225 70.739,22.225 71.12,22.225 54.229,22.606 54.61,22.606 54.991,22.606 55.372,22.606 62.103,22.606 62.484,22.606 62.865,22.606 63.246,22.606 69.977,22.606 70.358,22.606 70.739,22.606 71.12,22.606 54.229,22.987 54.61,22.987 54.991,22.987 55.372,22.987 62.103,22.987 62.484,22.987 62.865,22.987 63.246,22.987 69.977,22.987 70.358,22.987 70.739,22.987 71.12,22.987 54.229,23.368 54.61,23.368 54.991,23.368 55.372,23.368 62.103,23.368 62.484,23.368 62.865,23.368 63.246,23.368 69.977,23.368 70.358,23.368 70.739,23.368 71.12,23.368 54.229,23.749 54.61,23.749 54.991,23.749 55.372,23.749 62.103,23.749 62.484,23.749 62.865,23.749 63.246,23.749 69.977,23.749 70.358,23.749 70.739,23.749 71.12,23.749 54.229,24.13 54.61,24.13 54.991,24.13 55.372,24.13 62.103,24.13 62.484,24.13 62.865,24.13 63.246,24.13 69.977,24.13 70.358,24.13 70.739,24.13 71.12,24.13
H-: JP5.2 Q2.5 Q2.6 Q2.7 Q2.8 Q3.5 Q3.6 Q3.7 Q3.8 Q4.5 Q4.6 Q4.7 Q4.8 VD2.1 VD3.1 VD4.1 加热.2
MISO: MCU.2 U1.7 | length 13.7
  Top Layer w0.254: U1.7 2.939,32.581 2.939,31.732 3.556,31.115 4.318,31.115 4.83,31.627 4.83,33.36 5.2,33.73 8.584,33.73 11.024,36.17 MCU.2
NetB1_1: B1.1 R4.1 | length 1.8
  Top Layer w0.762: R4.1 B1.1
NetB1_2: B1.2 Q1.3 | length 1.7
  Top Layer w0.762: B1.2 Q1.3
NetC2_2: C2.2 IC2.4 | length 9.4
  Top Layer w0.381: C2.2 25.654,47.854 25.654,43.561 28.067,41.148 IC2.4
NetC4_1: C4.1 IC2.7 X1.1 | length 11.2
  Top Layer w0.381: IC2.7 30.607,44.958 33.401,42.164 X1.1
  Top Layer w0.762: X1.1 34.303,38.608 C4.1
NetC5_1: C5.1 IC2.8 X1.2 | length 8.2
  Top Layer w0.381: IC2.8 31.483,46.228 X1.2
  Top Layer w0.762: X1.2 34.303,45.212 C5.1
NetC6_2: C6.2 MCU.14 X2.2 | length 20.2
  Top Layer w0.381: X2.2 14.11,34.798 20.184,34.798 21.082,35.696 21.082,40.031 20.473,40.64 20.367,40.64 20.354,40.653 MCU.14
  Top Layer w1.016: X2.2 12.802,31.534 C6.2
NetC7_2: C7.2 MCU.15 X2.1 | length 17.4
  Top Layer w0.381: X2.1 18.275,34.163 20.447,34.163 21.717,35.433 21.717,40.513 20.777,41.453 MCU.15
  Top Layer w1.016: C7.2 15.646,31.534 X2.1
NetIC1_2: IC1.2 L1.1 VD1.2 | length 21.7
  Top Layer w0.762: VD1.2 64.687,37.929 68.326,34.29 72.513,34.29 72.959,33.844 72.959,32.021 IC1.2
NetJ1_1: J1.1 U1.3 | length 3.2
  Top Layer w0.508: J1.1 4.191,26.773 U1.3
NetJP3_3: JP3.3 调光.2 | length 21.7
  Top Layer w1.5: JP3.3 71.882,52.07 74.041,54.229 82.867,54.229 87.618,49.478 87.618,49.305 87.884,49.039 调光.2
NetLED1_1: R1.1 RXD.1 | length 1.7
  Top Layer w0.762: R1.1 43.688,26.67 RXD.1
NetLED2_1: R2.1 TXD.1 | length 1.7
  Top Layer w0.762: TXD.1 49.53,26.67 R2.1
NetLED3_1: R3.1 电源.1 | length 1.9
  Top Layer w1: R3.1 电源.1
NetLED4_1: R9.1 加热.1 | length 1.9
  Top Layer w1: R9.1 加热.1
NetQ1_1: Q1.1 R6.2 | length 2.9
  Top Layer w0.762: R6.2 23.584,18.288 23.584,18.443 25.181,20.04 25.181,20.128 25.312,20.259 Q1.1
NetQ2_4: Q2.4 R10.1 R11.2 | length 3.7
  Top Layer w0.381: Q2.4 52.421,20.637 52.612,20.828 R10.1
  Top Layer w0.762: R11.2 52.578,20.828 R10.1@52.612,20.828
NetQ3_4: Q3.4 R12.1 R13.2 | length 3.7
  Top Layer w0.381: Q3.4 60.295,20.637 60.486,20.828 R12.1
  Top Layer w0.762: R13.2 60.452,20.828 R12.1@60.486,20.828
NetQ4_4: Q4.4 R17.1 R18.2 | length 3.7
  Top Layer w0.381: Q4.4 68.169,20.637 68.36,20.828 R17.1
  Top Layer w0.762: R18.2 68.326,20.828 R17.1@68.36,20.828
P0.0: IC4.6 MCU.37 R15.1 | length 9.7
  Top Layer w0.381: R15.1 3.429,44.069 3.26,44.238 3.26,44.245 3.175,44.329 IC4.6 3.207,45.032 3.207,46.006 3.683,46.482 5.96,46.482 7.785,44.657 8.646,44.657 MCU.37
P0.1: IC4.5 MCU.36 R16.1 | length 11
  Top Layer w0.381: R16.1 IC4.5 1.937,45.032 1.937,46.006 3.048,47.117 6.223,47.117 7.874,45.466 8.081,45.466 8.094,45.453 MCU.36
P0.2: MCU.35 R6.1 R7.2 | length 41.7
  Top Layer w0.381: MCU.35 v3(9.587,46.253) ; R7.2@25.4,24.13 v3(25.4,25.068)
  Top Layer w0.762: R6.1 26.416,18.288 27.559,19.431 27.559,22.987 26.416,24.13 25.4,24.13 R7.2
  Bottom Layer w0.381: v3(9.587,46.253) 12.573,43.267 12.573,35.814 14.351,34.036 19.558,34.036 21.336,32.258 21.336,29.132 v3(25.4,25.068)
P0.3: JP6.6 MCU.34 | length 11.7
  Top Layer w0.381: v3(7.712,47.053) MCU.34
  Bottom Layer w0.381: v3(7.712,47.053) 7.874,47.215 7.874,53.068 8.629,53.823 10.389,53.823 JP6.6
P0.4: JP6.8 MCU.33 | length 9.2
  Top Layer w0.381: MCU.33 10.224,49.848 10.439,50.063 10.439,53.093 11.169,53.823 12.929,53.823 JP6.8
P0.5: JP3.4 MCU.32 | length 63.2
  Top Layer w0.381: MCU.32 11.024,49.759 12.446,51.181 21.336,51.181 22.225,50.292 v3(28.067,50.292) ; v3(30.607,50.292) 33.401,50.292 36.449,53.34 65.659,53.34 JP3.4
  Bottom Layer w0.381: v3(28.067,50.292) v3(30.607,50.292)
P0.6: JP3.5 MCU.31 | length 59.2
  Top Layer w0.381: MCU.31 11.824,49.543 12.827,50.546 20.828,50.546 21.717,49.657 v3(28.116,49.657) ; v3(30.49,49.657) 33.664,49.657 36.712,52.705 63.754,52.705 JP3.5
  Bottom Layer w0.381: v3(28.116,49.657) v3(30.49,49.657)
P0.7: JP3.6 MCU.30 | length 55.2
  Top Layer w0.381: MCU.30 12.628,48.634 12.628,49.296 13.243,49.911 20.147,49.911 21.036,49.022 v3(27.94,49.022) ; v3(30.483,49.022) 34.036,49.022 37.084,52.07 61.849,52.07 JP3.6
  Bottom Layer w0.381: v3(27.94,49.022) v3(30.483,49.022)
P1.0: IC3.1 IC3.3 MCU.40 R14.1 | length 15.3
  Top Layer w0.381: IC3.1 4.445,41.148 5.55,42.253 MCU.40
  Top Layer w0.762: R14.1 1.905,36.284 2.032,36.284 2.778,35.538 IC3.3 4.931,35.538 6.096,36.703 6.096,38.1 5.277,38.919 4.664,38.919 IC3.1
P1.1: JP4.3 MCU.41 SW4.1 SW4.4 | length 72.9
  Top Layer w0.381: v3(7.712,41.453) MCU.41
  Top Layer w0.762: JP4.3 34.642,13.081 v3(38.018,9.705)
  Bottom Layer w0.381: v3(7.712,41.453) 6.985,40.726 6.985,22.987 9.906,20.066 9.906,15.113 JP4.3 ; v3(38.018,9.705) SW4.4
  Bottom Layer w1.016: SW4.4 SW4.1
P1.2: JP4.4 MCU.42 SW3.1 SW3.4 | length 60.9
  Top Layer w0.381: v3(7.761,40.604) 7.806,40.649 8.646,40.649 MCU.42
  Top Layer w0.762: JP4.4 8.053,10.72 8.717,10.72 ; 8.717,10.721 24.302,10.721 v3(25.318,9.705)
  Bottom Layer w0.381: v3(7.761,40.604) 7.761,23.218 10.541,20.438 10.541,13.462 7.874,10.795 JP4.4 ; v3(25.318,9.705) SW3.4
  Bottom Layer w1.016: SW3.4 SW3.1
P1.3: JP6.4 MCU.43 | length 18.7
  Top Layer w0.381: MCU.43 10.135,39.853 10.668,40.386 10.668,46.725 7.874,49.519 7.874,53.848 JP6.4
P2.0: JP3.7 MCU.18 | length 46.7
  Top Layer w0.381: MCU.18 20.354,43.853 20.524,43.683 v3(20.524,43.673)
  Bottom Layer w0.381: v3(20.524,43.673) 23.176,41.021 53.086,41.021 JP3.7
P2.1: JP3.8 MCU.19 | length 43.8
  Top Layer w0.381: MCU.19 20.354,44.653 20.501,44.506 v3(20.589,44.506)
  Bottom Layer w0.381: v3(20.589,44.506) 23.312,41.783 51.308,41.783 JP3.8
P2.2: JP3.9 MCU.20 | length 41.1
  Top Layer w0.381: MCU.20 19.802,45.449 20.544,45.449 v3(20.638,45.355)
  Bottom Layer w0.381: v3(20.638,45.355) 23.575,42.418 49.403,42.418 JP3.9
P2.3: JP3.10 MCU.21 | length 38.4
  Top Layer w0.381: MCU.21 19.802,46.249 20.642,46.249 v3(20.687,46.204)
  Bottom Layer w0.381: v3(20.687,46.204) 23.838,43.053 47.498,43.053 JP3.10
P2.4: JP3.11 MCU.22 | length 33.3
  Top Layer w0.381: MCU.22 v3(20.736,47.053)
  Bottom Layer w0.381: v3(20.736,47.053) 21.332,46.457 42.727,46.457 42.752,46.482 48.387,46.482 JP3.11
P2.5: JP3.12 MCU.23 | length 33.6
  Top Layer w0.381: MCU.23 18.224,49.186 18.273,49.235 v3(18.273,49.276)
  Bottom Layer w0.381: v3(18.273,49.276) 18.478,49.481 19.226,49.481 21.615,47.092 42.464,47.092 42.489,47.117 46.482,47.117 JP3.12
P2.6: JP3.13 MCU.24 | length 32.1
  Top Layer w0.381: MCU.24 v3(17.424,49.276)
  Bottom Layer w0.381: v3(17.424,49.276) 17.424,49.568 18.021,50.165 19.812,50.165 22.25,47.727 42.201,47.727 42.226,47.752 44.45,47.752 46.355,49.657 JP3.13
P2.7: JP3.14 MCU.25 | length 30.4
  Top Layer w0.381: MCU.25 v3(16.624,49.276)
  Bottom Layer w0.381: v3(16.624,49.276) 16.624,49.666 17.758,50.8 20.075,50.8 22.513,48.362 41.938,48.362 41.963,48.387 42.672,48.387 JP3.14
P3.2: JP4.5 MCU.8 SW2.1 SW2.4 | length 56.2
  Top Layer w0.381: v3(9.822,38.862) 15.474,38.862 15.824,38.512 MCU.8
  Top Layer w0.762: JP4.5 10.914,8.001 v3(12.618,9.705)
  Bottom Layer w0.381: JP4.5 7.874,8.358 8.308,8.792 8.308,8.816 11.176,11.684 11.176,20.701 8.509,23.368 8.509,37.549 v3(9.822,38.862) ; v3(12.618,9.705) SW2.4
  Bottom Layer w1.016: SW2.4 SW2.1
P3.3: JP6.3 MCU.9 | length 18.2
  Top Layer w0.381: MCU.9 v3(16.624,38.44)
  Bottom Layer w0.381: JP6.3 9.144,47.594 16.624,40.114 v3(16.624,38.44)
P3.4: JP6.5 MCU.10 | length 17.5
  Top Layer w0.381: MCU.10 v3(17.424,38.44)
  Bottom Layer w0.381: JP6.5 11.684,45.952 17.424,40.212 v3(17.424,38.44)
P3.5: JP6.7 MCU.11 | length 16.7
  Top Layer w0.381: MCU.11 v3(18.224,38.44)
  Bottom Layer w0.381: JP6.7 14.224,44.577 18.224,40.577 v3(18.224,38.44)
PWM0: MCU.39 R11.1 R13.1 R18.1 | length 75.4
  Top Layer w0.381: MCU.39 v3(9.587,43.053) ; v3(52.329,25.395) 52.472,25.252 52.472,24.528 R11.1 ; R13.1 v3(60.452,25.4) ; R18.1 v3@68.326,25.273
  Bottom Layer w0.381: v3(9.587,43.053) 10.668,41.972 10.668,35.56 22.733,23.495 50.673,23.495 52.329,25.151 v3(52.329,25.395) 52.335,25.4 68.199,25.4 v3@68.326,25.273
  other v3: 68.326,25.4
RST: C3.1 MCU.4 R8.2 RESET.1 RESET.4 | length 40.7
  Top Layer w0.381: MCU.4 12.624,35.738 8.89,32.004 8.89,29.21 10.414,27.686 17.78,27.686 22.258,32.164 22.829,32.164 22.987,32.322 R8.2
  Top Layer w0.762: C3.1 R8.2@22.987,32.322 ; R8.2 24.854,32.347 25.273,32.766 25.273,33.712 RESET.1 RESET.4
SCK: MCU.3 U1.5 | length 9.2
  Top Layer w0.254: U1.5 8.215,32.599 11.824,36.208 MCU.3
VIN: E1.1 IC1.1 JP1.2 JP5.1 R9.2 VD2.2 VD3.2 VD4.2 | length 75.9
  Top Layer w1: IC1.1 67.263,31.877 66.077,31.877 63.968,33.986 63.904,33.986 63.754,34.136 E1.1 60.786,35.386 50.165,24.765 50.165,7.493 53.975,3.683 73.622,3.683 R9.2
pads on no net: IC2.9 IC2.10 IC2.11 IC2.12 IC2.13 IC2.14 IC2.15 MCU.1 MCU.6 MCU.12 MCU.13 MCU.17 MCU.26 MCU.27 MCU.28 MCU.29 Q2.9 Q3.9 Q4.9 U1.8 USB1.4

## Polygon pours and split planes (outlines as drawn)
GND on Top Layer "NONET_L-01_P-001" (solid, remove dead copper, pour order 18): 89.535,40.894 89.535,56.896 1.905,56.896 0.381,55.372 0.381,1.651 1.778,0.254 49.403,0.254 49.403,26.035 53.086,29.718 75.438,29.718 78.867,33.147 78.867,36.068 83.693,40.894
H- on Top Layer "NONET_L-01_P-001" (solid, remove dead copper, pour order 3): 52.07,18.288 76.073,18.288 84.582,26.797 89.662,26.797 89.662,11.43 88.011,9.779 53.34,9.779 52.07,11.049
VIN on Top Layer "NONET_L-01_P-001" (solid, remove dead copper, pour order 10): 79.248,28.448 57.404,28.448 56.388,27.432 56.388,20.32 58.674,20.32 58.674,26.035 59.436,26.797 63.754,26.797 64.389,26.162 64.389,20.447 66.548,20.447 66.548,26.162 67.183,26.797 79.248,26.797
VIN on Top Layer "NONET_L-01_P-001" (solid, remove dead copper, pour order 1): 83.566,39.624 89.662,39.624 89.662,27.686 84.328,27.686 77.216,20.574 72.009,20.574 72.009,27.559 77.851,27.559 80.01,29.718 80.01,36.068
VIN on Top Layer "NONET_L-01_P-001" (solid, remove dead copper, pour order 17): 70.866,30.607 71.882,30.607 71.882,28.194 70.866,28.194
H- on Top Layer "NONET_L-01_P-001" (solid, remove dead copper, pour order 16): 83.058,10.16 83.058,7.366 83.693,6.731 84.709,6.731 85.217,7.239 85.217,11.303
NetIC1_2 on Top Layer "NONET_L-01_P-001" (solid, remove dead copper, pour order 6): 56.642,39.243 56.642,36.576 56.515,36.449 49.403,36.449 49.403,39.243
GND on Top Layer "NONET_L-01_P-001" (solid, remove dead copper, pour order 15): 68.58,18.669 68.58,19.685 69.596,20.701 69.596,24.257 70.104,24.765 70.866,24.765 71.501,24.13 71.501,19.431 70.739,18.669
GND on Top Layer "NONET_L-01_P-001" (solid, remove dead copper, pour order 14): 60.706,18.669 60.706,19.685 61.722,20.701 61.722,24.257 62.23,24.765 62.992,24.765 63.627,24.13 63.627,19.431 62.865,18.669
GND on Top Layer "NONET_L-01_P-001" (solid, remove dead copper, pour order 13): 52.832,18.669 52.832,19.685 53.848,20.701 53.848,24.257 54.356,24.765 55.118,24.765 55.753,24.13 55.753,19.431 54.991,18.669
GND on Top Layer "NONET_L-01_P-001" (solid, remove dead copper, pour order 5): 70.739,47.371 49.784,47.371 48.133,45.72 48.133,44.577 48.895,43.815 70.739,43.815
GND on Bottom Layer "NONET_L-01_P-001" (solid, remove dead copper, pour order 19): 89.535,40.894 89.535,56.896 1.905,56.896 0.381,55.372 0.381,1.651 1.778,0.254 49.403,0.254 49.403,26.035 53.086,29.718 75.438,29.718 78.867,33.147 78.867,36.068 83.693,40.894
GND on Bottom Layer "NONET_L-01_P-001" (solid, remove dead copper, pour order 12): 89.662,47.244 89.662,42.672 87.884,40.894 83.566,40.894 78.867,36.195 78.867,20.447 77.089,18.669 51.943,18.669 51.943,24.003 75.237,47.297
no net on Top Solder "NONET_L-01_P-001" (solid): 89.662,27.686 80.01,27.686 80.01,36.068 83.566,39.624 89.535,39.624 89.662,39.497
no net on Top Solder "NONET_L-01_P-001" (solid): 84.582,26.797 89.662,26.797 89.662,13.335 89.535,13.208 76.073,13.208 76.073,18.288
no net on Top Solder "NONET_L-01_P-001" (solid, pour order 20): 52.07,13.97 89.662,13.97 89.612,13.92 89.612,11.38 88.011,9.779 53.34,9.779 52.07,11.049
no net on Bottom Solder "NONET_L-01_P-001" (solid): 89.535,40.767 89.535,44.792 73.621,44.792 68.961,40.132 68.961,25.019 68.707,24.765 52.705,24.765 51.943,24.003 51.943,18.669 75.438,18.669 78.867,22.098 78.867,36.068 83.566,40.767

## Keep-outs
Keep-Out Layer:
  lines w0.254: 0,3.023 0,54 cw(c3,54) 3,57 87,57 cw(c87,54) 90,54 90,3 cw(c87,3) 87,0 3.023,0 cw(c3.023,3) 0.023,3

## Silkscreen, mask and mechanical layers (free items; w line width, h text height)
Top Overlay:
  text "5V" at 6.223,53.586 h0.76
  text "P1.3" at 8.382,53.584 h0.76
  text "P0.3" at 10.922,53.584 h0.76
  text "P0.4" at 13.462,53.584 h0.76
  text "GND" at 16.257,53.586 h0.76
  text "P3.3" at 8.382,50.536 h0.76
  text "P3.4" at 10.922,50.536 h0.76
  text "P3.5" at 13.462,50.538 h0.76
  text "GND" at 83.453,42.165 h1.27 r90
  text "VIN" at 81.544,38.979 h1.27 r45
  text "加热" at 77.6,27.303 h2.54 r270
  text "GND" at 5.701,19.049 h1.27 r270
  text "温控板 v1.0" at 29.593,18.785 h3.4
  text "5V" at 5.702,16.256 h1.27 r270
  text "P1.1" at 5.69,14.224 h1.27 r270
  text "P1.2" at 5.69,11.43 h1.27 r270
  text "“极客”开始" at 11.176,9.664 h2.54
  text "P3.2" at 5.571,9.144 h1.27 r270
Bottom Overlay:
  text "电源" at 83.162,45.212 h2.54 r90
  text "VIN" at 88.279,30.48 h1.27 r90
  text "H-" at 88.29,25.018 h1.27 r90
Top Solder:
  rectangle: 53.848,19.431 55.753,24.257
  rectangle: 61.722,19.431 63.627,24.257

## Text inside footprints (layer, text, board x,y; h text height)
JP3: Bottom Overlay "LCD1602" at 50.926,34.377 h1.52